# Altium PCB pwr4.PcbDoc
Units mm, origin at the board's own origin, x right, y up, seen from the top; angles counter-clockwise.
Board outline 81.68 x 63.5 mm, 2 copper layers (Top Layer, Bottom Layer); 12 components, 4 nets, 98 pads, 0 vias.
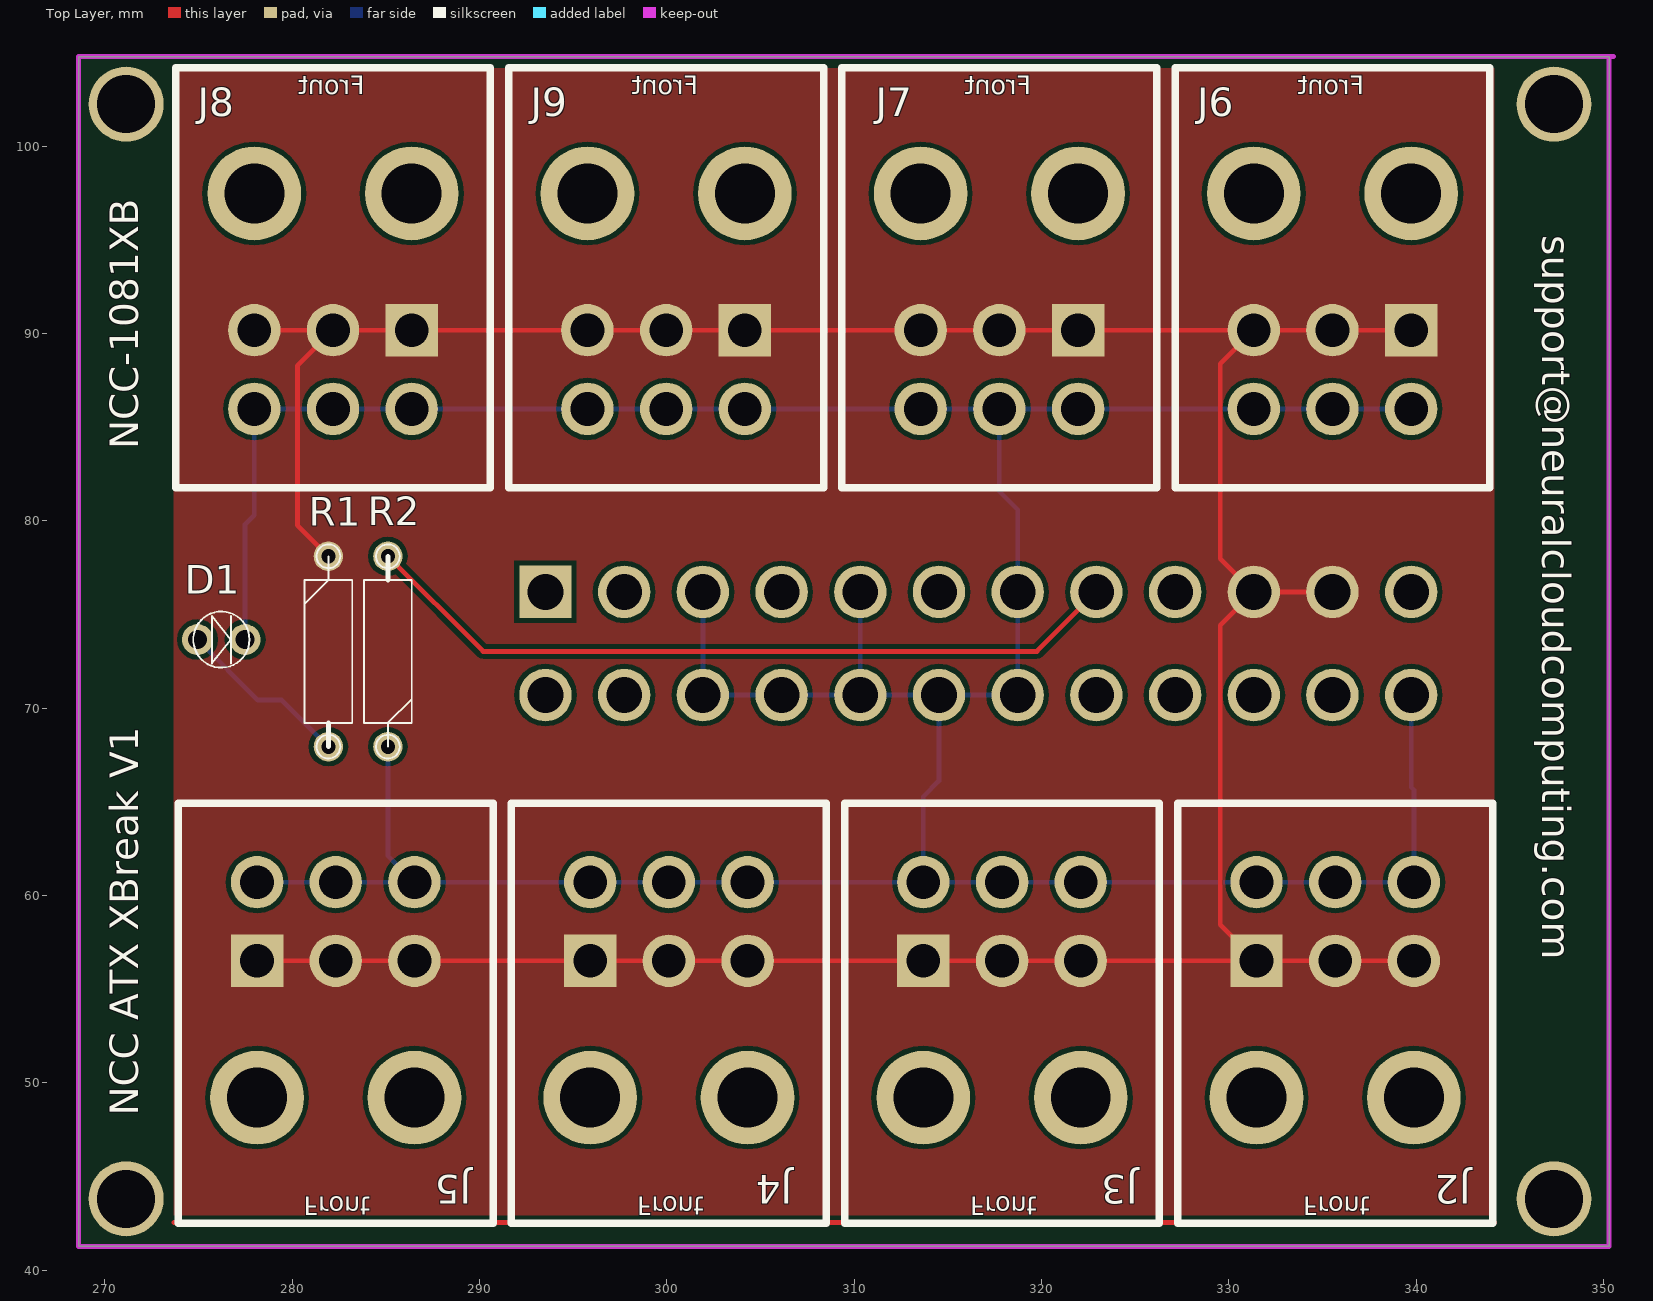
[diagram p0: Top Layer view]
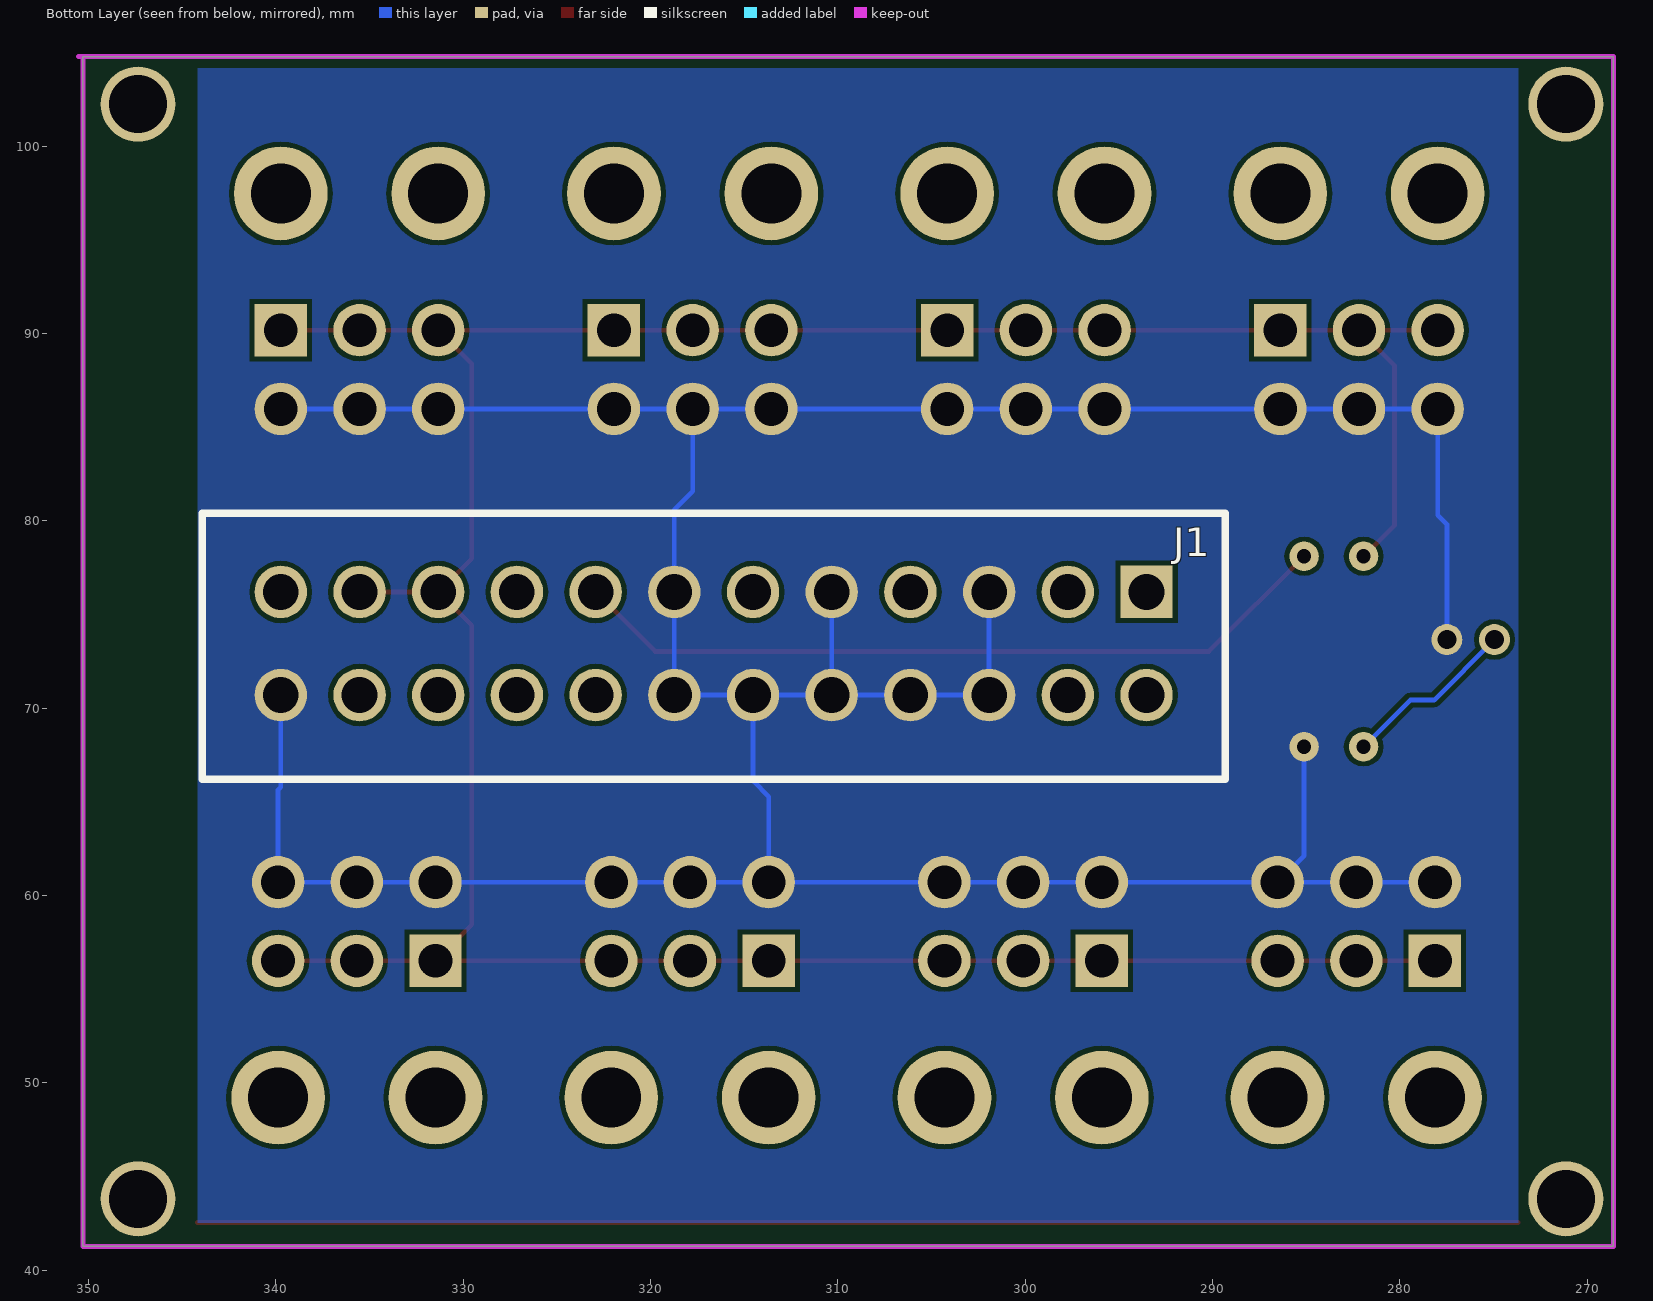
[diagram p1: Bottom Layer view, seen from below]

## Layer stack, top to bottom
Top Solder: solder mask 0.0102, Solder Resist, Dk 3.5
Top Layer: signal copper 0.0356
Dielectric 1: dielectric 0.32, FR-4, Dk 4.8
Bottom Layer: signal copper 0.0356
Bottom Solder: solder mask 0.0102, Solder Resist, Dk 3.5

## Board outline
268.605,104.775 268.605,73.025 268.605,41.275 350.286,41.275 350.286,96.52 350.286,104.775

## Design rules (kind name [scope] priority, off if disabled: settings)
Clearance Clearance_1 [All] p1: gap=0.254
Clearance PolyClearance [InPolygon and InNetClass('Power')] p2: gap=0.508
PolygonConnect [All] p1: connectstyle=Direct reliefconductorwidth=1.016 reliefentries=4 polygonreliefangle="90 Angle" airgapwidth=1.016
RoutingLayers RoutingLayers_GND [InNet('GND')] p1: top layer_v5=FALSE bottom layer_v5=TRUE
RoutingLayers RoutingLayers_V12 [InNet('V12')] p2: top layer_v5=TRUE bottom layer_v5=FALSE
RoutingLayers [All] p3: top layer_v5=TRUE bottom layer_v5=TRUE
RoutingVias [All] p1: holewidth=0.711 width=1.27 viastyle="Through Hole" minholewidth=0.711 minwidth=1.27 maxholewidth=0.711 maxwidth=1.27
SolderMaskExpansion [All] p1: expansion=0.102
Width [All] p1: maxlimit=0.254 minlimit=0.254 preferedwidth=0.254
29 further rules are at their usual default settings.

## Components (designator, comment, footprint, x,y, rotation, side; value= is the part's Value field where it differs from the comment)
D1 "LED-GREEN-3MM" LED-3MM-GREEN 274.955,73.66 r0 top
J1 "ATX Power" 46991-1024 293.525,76.2 r180 bottom
J2 "0455580003" 45558 331.47,56.515 r180 top
J3 "0455580003" 45558 313.69,56.515 r180 top
J4 "0455580003" 45558 295.91,56.515 r180 top
J5 "0455580003" 45558 278.13,56.515 r180 top
J6 "0455580003" 45558 339.725,90.17 r0 top
J7 "0455580003" 45558 321.945,90.17 r0 top
J8 "0455580003" 45558 286.385,90.17 r0 top
J9 "0455580003" 45558 304.165,90.17 r0 top
R1 "1K 1/4 watt" R 281.94,78.105 r0 top
R2 "1K 1/4 watt" R 285.115,67.945 r180 top

## Footprints (in the part's own frame and the unit in brackets; to place one, negate y for a bottom-side part, rotate by r counter-clockwise, add the part's x,y. Pads: shape width x height; smd on the part's side, far side on the other; paste and mask are expansions set on the pad)
45558 [mm] "6 CKT R/A Header Mini Fit Jr PCI-E Power"
  rect 2.8x2.8 hole 1.8: 1(0,0)
  round 2.8 hole 1.8: 2(-4.2,0) 3(-8.4,0) 4(0,-4.2) 5(-4.2,-4.2) 6(-8.4,-4.2)
  round 5 hole 3.2: 7(0,7.3) 8(-8.4,7.3)
  silkscreen extent -12.6,-8.4 4.2,14
46991-1024 [mm] "MINIFIT RTC Right Angle Header W/O PEG"
  rect 2.8x2.8 hole 1.9: 1(0,0)
  round 2.8 hole 1.9: 2(-4.2,0) 3(-8.4,0) 4(-12.6,0) 5(-16.8,0) 6(-21,0) 7(-25.2,0) 8(-29.4,0) 9(-33.6,0) 10(-37.8,0) 11(-42,0) 12(-46.2,0) 13(0,-5.5) 14(-4.2,-5.5) 15(-8.4,-5.5) 16(-12.6,-5.5) 17(-16.8,-5.5) 18(-21,-5.5) 19(-25.2,-5.5) 20(-29.4,-5.5) 21(-33.6,-5.5) 22(-37.8,-5.5) 23(-42,-5.5) 24(-46.2,-5.5)
  silkscreen extent -50.4,-10 4.2,4.2
LED-3MM-GREEN [mil]
  round 65 hole 40: A(0,0) K(100,0)
  silkscreen extent -9,-59 109,59, body extent -15,-63 114,67, height 250
R [mil]
  round 62 hole 30: 1(0,0) 2(0,-400)
  silkscreen extent -50,-425 50,25

## Part data
J1: library part 46991-2024, "Mini-Fit JR LCP RA HDR NOPEG 24C"
R1 R2: library part R-GENERIC, "GENERIC THROUGH HOLE 1/4 WATT RESISTOR 1K"

## Free pads (board coordinates)
  round 4 hole 3.1: 0(271.145,102.235) 1(271.145,43.815) 2(347.345,102.235) 3(347.345,43.815)

## Nets (pads, with @x,y where several pads share a name; then routed paths per layer and width w, separated by ;. In a path a pad name is that pad's centre, name@x,y a point inside that pad or via, vN(x,y) a via of type N, cw(c..) or ccw(c..) an arc to the next point about the centre after c; other vN are vias at no path point)
GND: D1.K J1.3 J1.5 J1.7 J1.15 J1.16 J1.17 J1.18 J1.19 J1.24 J2.4 J2.5 J2.6 J3.4 J3.5 J3.6 J4.4 J4.5 J4.6 J5.4 J5.5 J5.6 J6.4 J6.5 J6.6 J7.4 J7.5 J7.6 J8.4 J8.5 J8.6 J9.4 J9.5 J9.6 R2.1 | length 207.7
  Bottom Layer w0.254: D1.K 277.495,79.807 277.985,80.297 J8.6 J8.5 J8.4 J9.6 J9.5 J9.4 J7.6 J7.5 ; J5.4 J5.5 J5.6 ; R2.1 285.115,62.13 J5.6 ; J1.3 J1.15 J1.16 J1.17 ; J1.5 J1.17 ; J1.24 339.725,65.779 339.87,65.634 J2.6 J2.5 J2.4 J3.6 J3.5 J3.4 ; J6.4 J6.5 J6.6 J7.4 J7.5 ; J5.6 J4.4 J4.5 J4.6 J3.4 ; J1.17 J1.18 ; J3.4 313.69,65.278 314.525,66.113 J1.18 ; J1.18 J1.19 J1.7 318.725,80.594 317.745,81.574 J7.5
NetD1_A: D1.A R1.2 | length 9.4
  Bottom Layer w0.254: D1.A 278.181,70.434 279.451,70.434 R1.2
NetJ1_8: J1.8 R2.2 | length 41.2
  Top Layer w0.254: R2.2 290.195,73.025 319.75,73.025 J1.8
V12: J1.10 J1.11 J2.1 J2.2 J2.3 J3.1 J3.2 J3.3 J4.1 J4.2 J4.3 J5.1 J5.2 J5.3 J6.1 J6.2 J6.3 J7.1 J7.2 J7.3 J8.1 J8.2 J8.3 J9.1 J9.2 J9.3 R1.1 | length 177.9
  Top Layer w0.254: J8.3 J8.2 ; J5.1 J5.2 J5.3 J4.1 J4.2 J4.3 J3.1 J3.2 J3.3 J2.1 ; R1.1 280.289,79.756 280.289,88.274 J8.2 ; J1.11 J1.10 ; J6.1 J6.2 J6.3 ; J2.3 J2.2 J2.1 ; J8.2 J8.1 J9.3 J9.2 J9.1 J7.3 J7.2 J7.1 J6.3 ; J1.10 329.54,77.985 329.54,88.385 J6.3 ; J1.10 329.54,74.415 329.54,58.445 J2.1
pads on no net: J1.1 J1.2 J1.4 J1.6 J1.9 J1.12 J1.13 J1.14 J1.20 J1.21 J1.22 J1.23 J2.7 J2.8 J3.7 J3.8 J4.7 J4.8 J5.7 J5.8 J6.7 J6.8 J7.7 J7.8 J8.7 J8.8 J9.7 J9.8
copper on no net: | length 70.5
  Top Layer w0.254: 273.685,42.545 344.17,42.545

## Polygon pours and split planes (outlines as drawn)
V12 on Top Layer "Top Layer-V12" (solid, remove dead copper, pour order 7): 273.685,104.14 273.685,42.545 344.17,42.545 344.17,104.14 273.685,104.14
GND on Bottom Layer "Bottom Layer-Gnd" (solid, remove dead copper, pour order 6): 273.685,104.14 273.685,42.545 344.17,42.545 344.17,104.14 273.685,104.14

## Keep-outs
Keep-Out Layer:
  lines w0.254: 350.52,104.775 268.605,104.775 268.605,41.275 ; 268.605,41.275 350.286,41.275 ; 268.605,41.275 268.605,41.275 ; 350.286,41.275 350.286,104.775 ; 350.286,41.275 350.286,41.275 ; 350.286,104.775 350.286,104.775

## Silkscreen, mask and mechanical layers (free items; w line width, h text height)
Top Overlay:
  text "support@neuralcloudcomputing.com" at 346.71,95.25 h1.52 r270
  text "NCC-1081XB" at 271.78,83.82 h1.52 r90
  text "NCC ATX XBreak V1" at 271.78,48.26 h1.52 r90
Mechanical 1:
  lines w0.254: 268.6,41.575 268.9,41.275 350.1,41.275 350.286,41.461 350.286,104.689 350.197,104.6 268.6,104.6 268.6,41.575

## Dimensions
263,104.8 to 264,41.3 on Top Overlay
268.6,109.5 to 350.3,108.3 on Top Overlay

## Text inside footprints (layer, text, board x,y; h text height)
J2: Top Overlay "Front" at 333.97,43.915 h1 r180
J3: Top Overlay "Front" at 316.19,43.915 h1 r180
J4: Top Overlay "Front" at 298.41,43.915 h1 r180
J5: Top Overlay "Front" at 280.63,43.915 h1 r180
J6: Top Overlay "Front" at 337.225,102.77 h1
J7: Top Overlay "Front" at 319.445,102.77 h1
J8: Top Overlay "Front" at 283.885,102.77 h1
J9: Top Overlay "Front" at 301.665,102.77 h1